# Altium PCB copper_suicide.PcbDoc (part 4 of 6)
Units mm, origin at the board's own origin, x right, y up, seen from the top; angles counter-clockwise.
Board outline 200 x 200 mm, 10 copper layers (Top Layer, Signal Layer 1, Signal Layer 2, Signal Layer 3, Signal Layer 4, Signal Layer 5, Signal Layer 6, Signal Layer 7, Signal Layer 8, Bottom Layer), stack 1.555 mm thick; 36 components, 3934 nets, 1640 pads, 0 vias.
Unrouted connection lines stored in the file: 671.
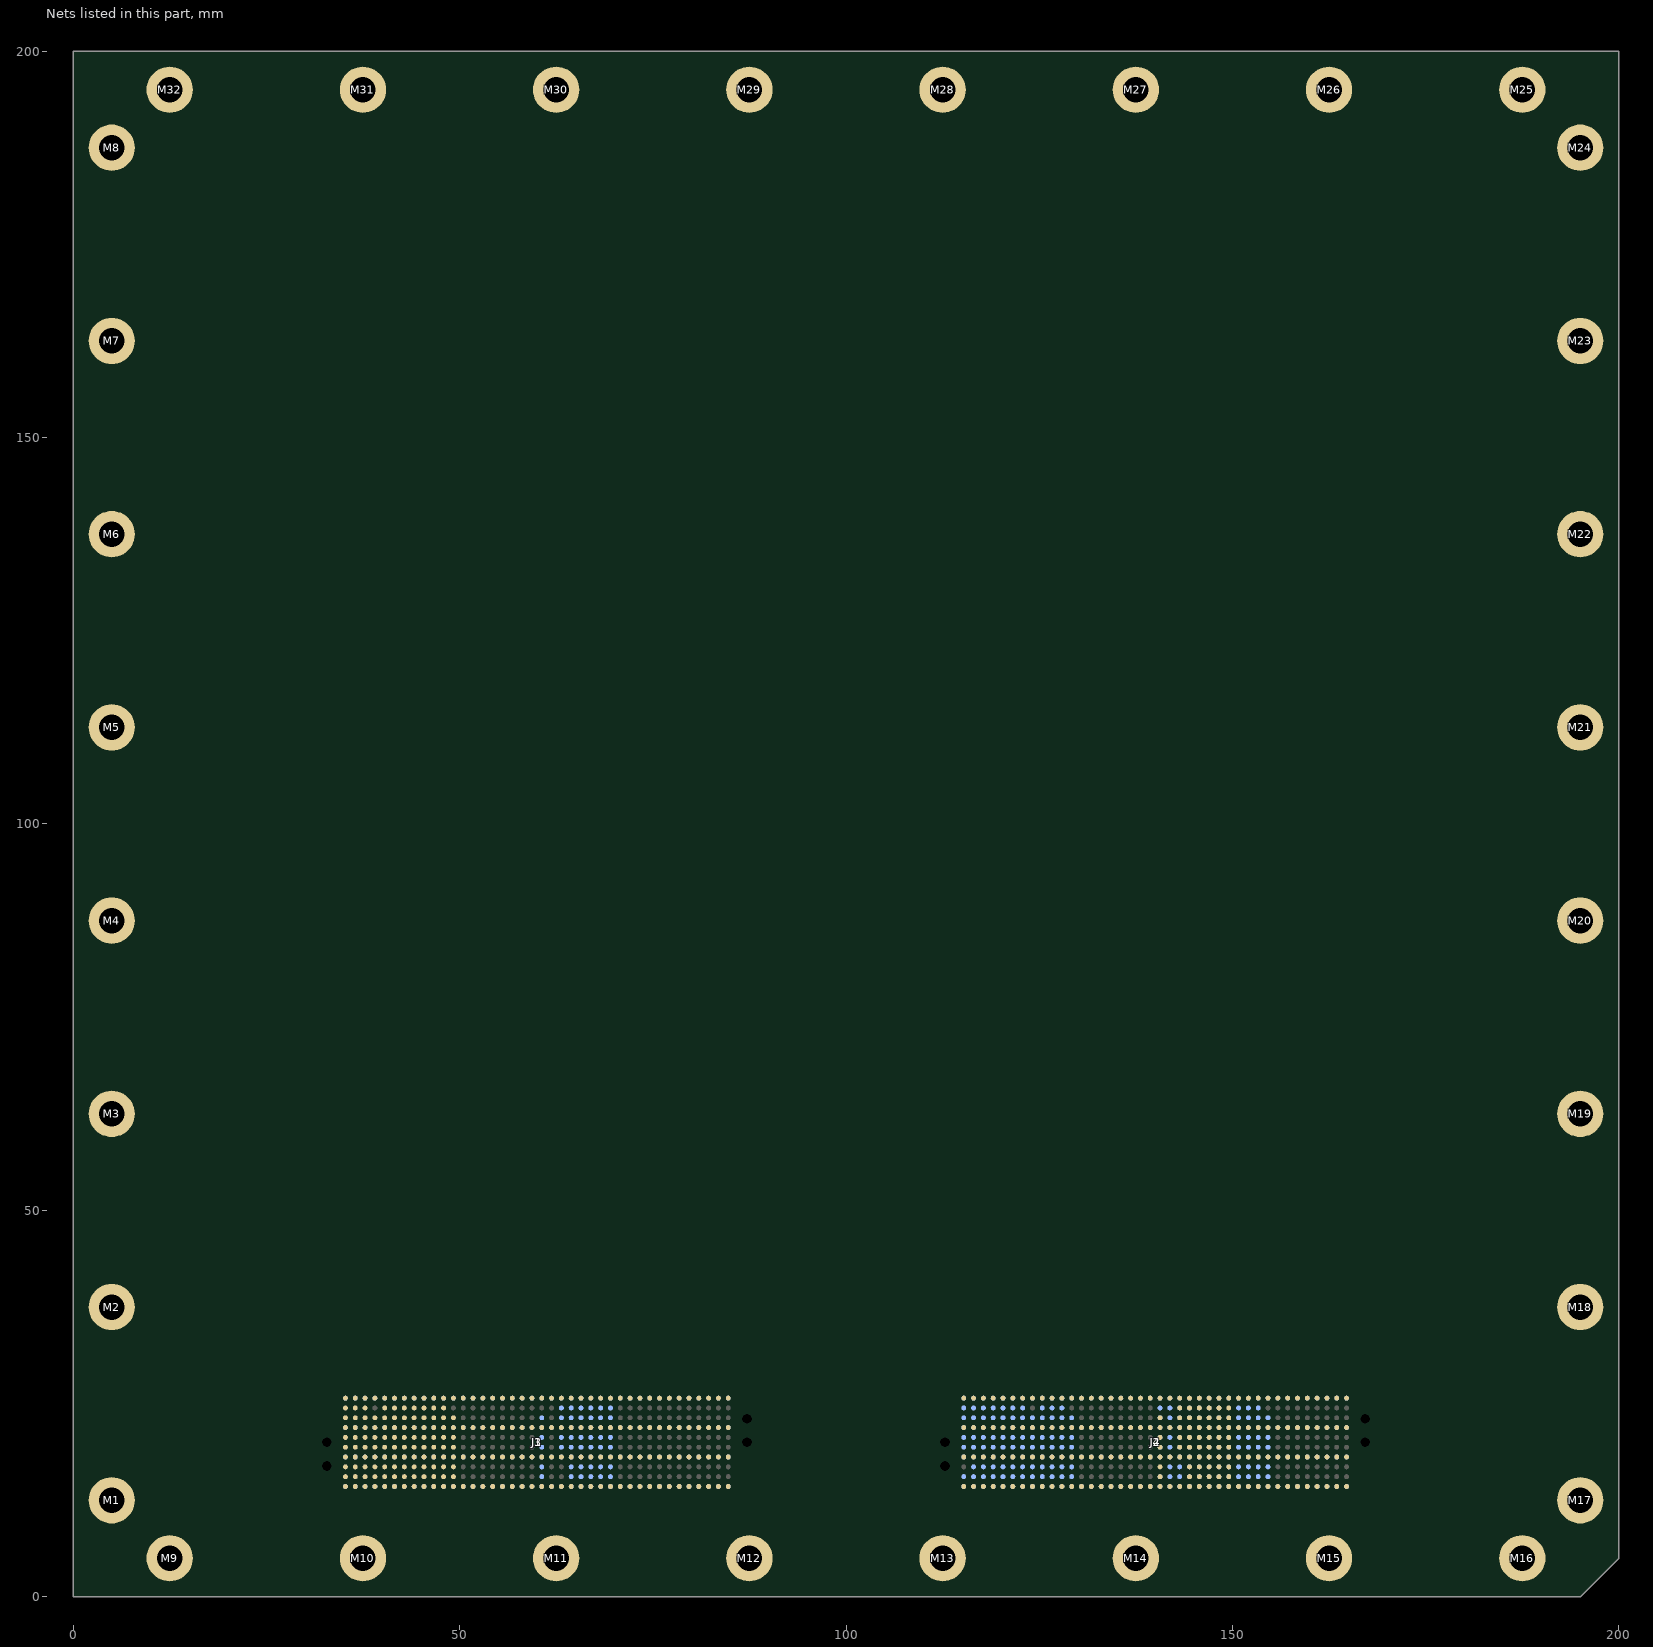
[diagram p4: the nets of this part, all layers, seen from the top]

## Footprints (in the part's own frame and the unit in brackets; to place one, negate y for a bottom-side part, rotate by r counter-clockwise, add the part's x,y. Pads: shape width x height; smd on the part's side, far side on the other; paste and mask are expansions set on the pad)
MOUNTM3 [mm] "M3 Standard Fit Hole"
  round 6 hole 3.3 paste+0: 1(0,0)
SEAF-40-06.5-S-10-2-A-K-TR [mil] "Terminal Array Assembly, Surface Mount, 0.050\" Pitch, 400 Pins"
  round 25 smd paste+5 mask+2: 1(975,-225) 2(975,-175) 3(975,-125) 4(975,-75) 5(975,-25) 6(975,25) 7(975,75) 8(975,125) 9(975,175) 10(975,225) 11(925,-225) 12(925,-175) 13(925,-125) 14(925,-75) 15(925,-25) 16(925,25) 17(925,75) 18(925,125) 19(925,175) 20(925,225) 21(875,-225) 22(875,-175) 23(875,-125) 24(875,-75) 25(875,-25) 26(875,25) 27(875,75) 28(875,125) 29(875,175) 30(875,225) 31(825,-225) 32(825,-175) 33(825,-125) 34(825,-75) 35(825,-25) 36(825,25) 37(825,75) 38(825,125) 39(825,175) 40(825,225) 41(775,-225) 42(775,-175) 43(775,-125) 44(775,-75) 45(775,-25) 46(775,25) 47(775,75) 48(775,125) 49(775,175) 50(775,225) 51(725,-225) 52(725,-175) 53(725,-125) 54(725,-75) 55(725,-25) 56(725,25) 57(725,75) 58(725,125) 59(725,175) 60(725,225) 61(675,-225) 62(675,-175) 63(675,-125) 64(675,-75) 65(675,-25) 66(675,25) 67(675,75) 68(675,125) 69(675,175) 70(675,225) 71(625,-225) 72(625,-175) 73(625,-125) 74(625,-75) 75(625,-25) 76(625,25) 77(625,75) 78(625,125) 79(625,175) 80(625,225) 81(575,-225) 82(575,-175) 83(575,-125) 84(575,-75) 85(575,-25) 86(575,25) 87(575,75) 88(575,125) 89(575,175) 90(575,225) 91(525,-225) 92(525,-175) 93(525,-125) 94(525,-75) 95(525,-25) 96(525,25) 97(525,75) 98(525,125) 99(525,175) 100(525,225) 101(475,-225) 102(475,-175) 103(475,-125) 104(475,-75) 105(475,-25) 106(475,25) 107(475,75) 108(475,125) 109(475,175) 110(475,225) 111(425,-225) 112(425,-175) 113(425,-125) 114(425,-75) 115(425,-25) 116(425,25) 117(425,75) 118(425,125) 119(425,175) 120(425,225) 121(375,-225) 122(375,-175) 123(375,-125) 124(375,-75) 125(375,-25) 126(375,25) 127(375,75) 128(375,125) 129(375,175) 130(375,225) 131(325,-225) 132(325,-175) 133(325,-125) 134(325,-75) 135(325,-25) 136(325,25) 137(325,75) 138(325,125) 139(325,175) 140(325,225) 141(275,-225) 142(275,-175) 143(275,-125) 144(275,-75) 145(275,-25) 146(275,25) 147(275,75) 148(275,125) 149(275,175) 150(275,225) 151(225,-225) 152(225,-175) 153(225,-125) 154(225,-75) 155(225,-25) 156(225,25) 157(225,75) 158(225,125) 159(225,175) 160(225,225) 161(175,-225) 162(175,-175) 163(175,-125) 164(175,-75) 165(175,-25) 166(175,25) 167(175,75) 168(175,125) 169(175,175) 170(175,225) 171(125,-225) 172(125,-175) 173(125,-125) 174(125,-75) 175(125,-25) 176(125,25) 177(125,75) 178(125,125) 179(125,175) 180(125,225) 181(75,-225) 182(75,-175) 183(75,-125) 184(75,-75) 185(75,-25) 186(75,25) 187(75,75) 188(75,125) 189(75,175) 190(75,225) 191(25,-225) 192(25,-175) 193(25,-125) 194(25,-75) 195(25,-25) 196(25,25) 197(25,75) 198(25,125) 199(25,175) 200(25,225) 201(-25,-225) 202(-25,-175) 203(-25,-125) 204(-25,-75) 205(-25,-25) 206(-25,25) 207(-25,75) 208(-25,125) 209(-25,175) 210(-25,225) 211(-75,-225) 212(-75,-175) 213(-75,-125) 214(-75,-75) 215(-75,-25) 216(-75,25) 217(-75,75) 218(-75,125) 219(-75,175) 220(-75,225) 221(-125,-225) 222(-125,-175) 223(-125,-125) 224(-125,-75) 225(-125,-25) 226(-125,25) 227(-125,75) 228(-125,125) 229(-125,175) 230(-125,225) 231(-175,-225) 232(-175,-175) 233(-175,-125) 234(-175,-75) 235(-175,-25) 236(-175,25) 237(-175,75) 238(-175,125) 239(-175,175) 240(-175,225) 241(-225,-225) 242(-225,-175) 243(-225,-125) 244(-225,-75) 245(-225,-25) 246(-225,25) 247(-225,75) 248(-225,125) 249(-225,175) 250(-225,225) 251(-275,-225) 252(-275,-175) 253(-275,-125) 254(-275,-75) 255(-275,-25) 256(-275,25) 257(-275,75) 258(-275,125) 259(-275,175) 260(-275,225) 261(-325,-225) 262(-325,-175) 263(-325,-125) 264(-325,-75) 265(-325,-25) 266(-325,25) 267(-325,75) 268(-325,125) 269(-325,175) 270(-325,225) 271(-375,-225) 272(-375,-175) 273(-375,-125) 274(-375,-75) 275(-375,-25) 276(-375,25) 277(-375,75) 278(-375,125) 279(-375,175) 280(-375,225) 281(-425,-225) 282(-425,-175) 283(-425,-125) 284(-425,-75) 285(-425,-25) 286(-425,25) 287(-425,75) 288(-425,125) 289(-425,175) 290(-425,225) 291(-475,-225) 292(-475,-175) 293(-475,-125) 294(-475,-75) 295(-475,-25) 296(-475,25) 297(-475,75) 298(-475,125) 299(-475,175) 300(-475,225) 301(-525,-225) 302(-525,-175) 303(-525,-125) 304(-525,-75) 305(-525,-25) 306(-525,25) 307(-525,75) 308(-525,125) 309(-525,175) 310(-525,225) 311(-575,-225) 312(-575,-175) 313(-575,-125) 314(-575,-75) 315(-575,-25) 316(-575,25) 317(-575,75) 318(-575,125) 319(-575,175) 320(-575,225) 321(-625,-225) 322(-625,-175) 323(-625,-125) 324(-625,-75) 325(-625,-25) 326(-625,25) 327(-625,75) 328(-625,125) 329(-625,175) 330(-625,225) 331(-675,-225) 332(-675,-175) 333(-675,-125) 334(-675,-75) 335(-675,-25) 336(-675,25) 337(-675,75) 338(-675,125) 339(-675,175) 340(-675,225) 341(-725,-225) 342(-725,-175) 343(-725,-125) 344(-725,-75) 345(-725,-25) 346(-725,25) 347(-725,75) 348(-725,125) 349(-725,175) 350(-725,225) 351(-775,-225) 352(-775,-175) 353(-775,-125) 354(-775,-75) 355(-775,-25) 356(-775,25) 357(-775,75) 358(-775,125) 359(-775,175) 360(-775,225) 361(-825,-225) 362(-825,-175) 363(-825,-125) 364(-825,-75) 365(-825,-25) 366(-825,25) 367(-825,75) 368(-825,125) 369(-825,175) 370(-825,225) 371(-875,-225) 372(-875,-175) 373(-875,-125) 374(-875,-75) 375(-875,-25) 376(-875,25) 377(-875,75) 378(-875,125) 379(-875,175) 380(-875,225) 381(-925,-225) 382(-925,-175) 383(-925,-125) 384(-925,-75) 385(-925,-25) 386(-925,25) 387(-925,75) 388(-925,125) 389(-925,175) 390(-925,225) 391(-975,-225) 392(-975,-175) 393(-975,-125) 394(-975,-75) 395(-975,-25) 396(-975,25) 397(-975,75) 398(-975,125) 399(-975,175) 400(-975,225)
  round 25 hole 50 unplated mask+22.5: 401(1070.5,-120) 402(-1070.5,0)
  silkscreen extent -1151,-281 1151,281
SEAM-40-11.0-S-10-2-A-K-TR [mil] "Terminal Array Assembly, Surface Mount, 0.050\" Pitch, 400 Pins"
  round 25 smd paste+5 mask+2: 1(975,225) 2(975,175) 3(975,125) 4(975,75) 5(975,25) 6(975,-25) 7(975,-75) 8(975,-125) 9(975,-175) 10(975,-225) 11(925,225) 12(925,175) 13(925,125) 14(925,75) 15(925,25) 16(925,-25) 17(925,-75) 18(925,-125) 19(925,-175) 20(925,-225) 21(875,225) 22(875,175) 23(875,125) 24(875,75) 25(875,25) 26(875,-25) 27(875,-75) 28(875,-125) 29(875,-175) 30(875,-225) 31(825,225) 32(825,175) 33(825,125) 34(825,75) 35(825,25) 36(825,-25) 37(825,-75) 38(825,-125) 39(825,-175) 40(825,-225) 41(775,225) 42(775,175) 43(775,125) 44(775,75) 45(775,25) 46(775,-25) 47(775,-75) 48(775,-125) 49(775,-175) 50(775,-225) 51(725,225) 52(725,175) 53(725,125) 54(725,75) 55(725,25) 56(725,-25) 57(725,-75) 58(725,-125) 59(725,-175) 60(725,-225) 61(675,225) 62(675,175) 63(675,125) 64(675,75) 65(675,25) 66(675,-25) 67(675,-75) 68(675,-125) 69(675,-175) 70(675,-225) 71(625,225) 72(625,175) 73(625,125) 74(625,75) 75(625,25) 76(625,-25) 77(625,-75) 78(625,-125) 79(625,-175) 80(625,-225) 81(575,225) 82(575,175) 83(575,125) 84(575,75) 85(575,25) 86(575,-25) 87(575,-75) 88(575,-125) 89(575,-175) 90(575,-225) 91(525,225) 92(525,175) 93(525,125) 94(525,75) 95(525,25) 96(525,-25) 97(525,-75) 98(525,-125) 99(525,-175) 100(525,-225) 101(475,225) 102(475,175) 103(475,125) 104(475,75) 105(475,25) 106(475,-25) 107(475,-75) 108(475,-125) 109(475,-175) 110(475,-225) 111(425,225) 112(425,175) 113(425,125) 114(425,75) 115(425,25) 116(425,-25) 117(425,-75) 118(425,-125) 119(425,-175) 120(425,-225) 121(375,225) 122(375,175) 123(375,125) 124(375,75) 125(375,25) 126(375,-25) 127(375,-75) 128(375,-125) 129(375,-175) 130(375,-225) 131(325,225) 132(325,175) 133(325,125) 134(325,75) 135(325,25) 136(325,-25) 137(325,-75) 138(325,-125) 139(325,-175) 140(325,-225) 141(275,225) 142(275,175) 143(275,125) 144(275,75) 145(275,25) 146(275,-25) 147(275,-75) 148(275,-125) 149(275,-175) 150(275,-225) 151(225,225) 152(225,175) 153(225,125) 154(225,75) 155(225,25) 156(225,-25) 157(225,-75) 158(225,-125) 159(225,-175) 160(225,-225) 161(175,225) 162(175,175) 163(175,125) 164(175,75) 165(175,25) 166(175,-25) 167(175,-75) 168(175,-125) 169(175,-175) 170(175,-225) 171(125,225) 172(125,175) 173(125,125) 174(125,75) 175(125,25) 176(125,-25) 177(125,-75) 178(125,-125) 179(125,-175) 180(125,-225) 181(75,225) 182(75,175) 183(75,125) 184(75,75) 185(75,25) 186(75,-25) 187(75,-75) 188(75,-125) 189(75,-175) 190(75,-225) 191(25,225) 192(25,175) 193(25,125) 194(25,75) 195(25,25) 196(25,-25) 197(25,-75) 198(25,-125) 199(25,-175) 200(25,-225) 201(-25,225) 202(-25,175) 203(-25,125) 204(-25,75) 205(-25,25) 206(-25,-25) 207(-25,-75) 208(-25,-125) 209(-25,-175) 210(-25,-225) 211(-75,225) 212(-75,175) 213(-75,125) 214(-75,75) 215(-75,25) 216(-75,-25) 217(-75,-75) 218(-75,-125) 219(-75,-175) 220(-75,-225) 221(-125,225) 222(-125,175) 223(-125,125) 224(-125,75) 225(-125,25) 226(-125,-25) 227(-125,-75) 228(-125,-125) 229(-125,-175) 230(-125,-225) 231(-175,225) 232(-175,175) 233(-175,125) 234(-175,75) 235(-175,25) 236(-175,-25) 237(-175,-75) 238(-175,-125) 239(-175,-175) 240(-175,-225) 241(-225,225) 242(-225,175) 243(-225,125) 244(-225,75) 245(-225,25) 246(-225,-25) 247(-225,-75) 248(-225,-125) 249(-225,-175) 250(-225,-225) 251(-275,225) 252(-275,175) 253(-275,125) 254(-275,75) 255(-275,25) 256(-275,-25) 257(-275,-75) 258(-275,-125) 259(-275,-175) 260(-275,-225) 261(-325,225) 262(-325,175) 263(-325,125) 264(-325,75) 265(-325,25) 266(-325,-25) 267(-325,-75) 268(-325,-125) 269(-325,-175) 270(-325,-225) 271(-375,225) 272(-375,175) 273(-375,125) 274(-375,75) 275(-375,25) 276(-375,-25) 277(-375,-75) 278(-375,-125) 279(-375,-175) 280(-375,-225) 281(-425,225) 282(-425,175) 283(-425,125) 284(-425,75) 285(-425,25) 286(-425,-25) 287(-425,-75) 288(-425,-125) 289(-425,-175) 290(-425,-225) 291(-475,225) 292(-475,175) 293(-475,125) 294(-475,75) 295(-475,25) 296(-475,-25) 297(-475,-75) 298(-475,-125) 299(-475,-175) 300(-475,-225) 301(-525,225) 302(-525,175) 303(-525,125) 304(-525,75) 305(-525,25) 306(-525,-25) 307(-525,-75) 308(-525,-125) 309(-525,-175) 310(-525,-225) 311(-575,225) 312(-575,175) 313(-575,125) 314(-575,75) 315(-575,25) 316(-575,-25) 317(-575,-75) 318(-575,-125) 319(-575,-175) 320(-575,-225) 321(-625,225) 322(-625,175) 323(-625,125) 324(-625,75) 325(-625,25) 326(-625,-25) 327(-625,-75) 328(-625,-125) 329(-625,-175) 330(-625,-225) 331(-675,225) 332(-675,175) 333(-675,125) 334(-675,75) 335(-675,25) 336(-675,-25) 337(-675,-75) 338(-675,-125) 339(-675,-175) 340(-675,-225) 341(-725,225) 342(-725,175) 343(-725,125) 344(-725,75) 345(-725,25) 346(-725,-25) 347(-725,-75) 348(-725,-125) 349(-725,-175) 350(-725,-225) 351(-775,225) 352(-775,175) 353(-775,125) 354(-775,75) 355(-775,25) 356(-775,-25) 357(-775,-75) 358(-775,-125) 359(-775,-175) 360(-775,-225) 361(-825,225) 362(-825,175) 363(-825,125) 364(-825,75) 365(-825,25) 366(-825,-25) 367(-825,-75) 368(-825,-125) 369(-825,-175) 370(-825,-225) 371(-875,225) 372(-875,175) 373(-875,125) 374(-875,75) 375(-875,25) 376(-875,-25) 377(-875,-75) 378(-875,-125) 379(-875,-175) 380(-875,-225) 381(-925,225) 382(-925,175) 383(-925,125) 384(-925,75) 385(-925,25) 386(-925,-25) 387(-925,-75) 388(-925,-125) 389(-925,-175) 390(-925,-225) 391(-975,225) 392(-975,175) 393(-975,125) 394(-975,75) 395(-975,25) 396(-975,-25) 397(-975,-75) 398(-975,-125) 399(-975,-175) 400(-975,-225)
  round 0 hole 50 unplated: 401(1070.5,0) 402(-1070.5,-120)
  silkscreen extent -1118,-334 1153,334

## Part data
J1 J2 J3 J4: "Terminal Array Assembly, Surface Mount, 0.050\" Pitch, 400 Pins"
M1 M2 M3 M4 M5 M6 M7 M8 M9 M10 M11 M12 M13 M14 M15 M16 M17 M18 M19 M20 M21 M22 M23 M24 M25 M26 M27 M28 M29 M30 M31 M32: "M3 Standard Fit Hole"

## Nets (pads, with @x,y where several pads share a name; then routed paths per layer and width w, separated by ;. In a path a pad name is that pad's centre, name@x,y a point inside that pad or via, vN(x,y) a via of type N, cw(c..) or ccw(c..) an arc to the next point about the centre after c; other vN are vias at no path point)
A00.CTRL.CASN_5: 
A00.CTRL.CKE_5: 
A00.CTRL.CLK_5_N: 
A00.CTRL.CLK_5_P: 
A00.CTRL.CSN_5: 
A00.CTRL.ODT_5: 
A00.CTRL.RASN_5: 
A00.CTRL.RSTN_5: 
A00.CTRL.WEN_5: 
A00.DA/B.A0_5: 
A00.DA/B.A1_5: 
A00.DA/B.A2_5: 
A00.DA/B.A3_5: 
A00.DA/B.A4_5: 
A00.DA/B.A5_5: 
A00.DA/B.A6_5: 
A00.DA/B.A7_5: 
A00.DA/B.A8_5: 
A00.DA/B.A9_5: 
A00.DA/B.A10_5: 
A00.DA/B.A11_5: 
A00.DA/B.A12_5: 
A00.DA/B.A13_5: 
A00.DA/B.A14_5: 
A00.DA/B.A15_5: 
A00.DA/B.B0_5: 
A00.DA/B.B1_5: 
A00.DA/B.B2_5: 
A01.CTRL.CASN_5: 
A01.CTRL.CKE_5: 
A01.CTRL.CLK_5_N: 
A01.CTRL.CLK_5_P: 
A01.CTRL.CSN_5: 
A01.CTRL.ODT_5: 
A01.CTRL.RASN_5: 
A01.CTRL.RSTN_5: 
A01.CTRL.WEN_5: 
A01.DA/B.A0_5: 
A01.DA/B.A1_5: 
A01.DA/B.A2_5: 
A01.DA/B.A3_5: 
A01.DA/B.A4_5: 
A01.DA/B.A5_5: 
A01.DA/B.A6_5: 
A01.DA/B.A7_5: 
A01.DA/B.A8_5: 
A01.DA/B.A9_5: 
A01.DA/B.A10_5: 
A01.DA/B.A11_5: 
A01.DA/B.A12_5: 
A01.DA/B.A13_5: 
A01.DA/B.A14_5: 
A01.DA/B.A15_5: 
A01.DA/B.B0_5: 
A01.DA/B.B1_5: 
A01.DA/B.B2_5: 
A02.CTRL.CASN_5: 
A02.CTRL.CKE_5: 
A02.CTRL.CLK_5_N: 
A02.CTRL.CLK_5_P: 
A02.CTRL.CSN_5: 
A02.CTRL.ODT_5: 
A02.CTRL.RASN_5: 
A02.CTRL.RSTN_5: 
A02.CTRL.WEN_5: 
A02.DA/B.A0_5: 
A02.DA/B.A1_5: 
A02.DA/B.A2_5: 
A02.DA/B.A3_5: 
A02.DA/B.A4_5: 
A02.DA/B.A5_5: 
A02.DA/B.A6_5: 
A02.DA/B.A7_5: 
A02.DA/B.A8_5: 
A02.DA/B.A9_5: 
A02.DA/B.A10_5: 
A02.DA/B.A11_5: 
A02.DA/B.A12_5: 
A02.DA/B.A13_5: 
A02.DA/B.A14_5: 
A02.DA/B.A15_5: 
A02.DA/B.B0_5: 
A02.DA/B.B1_5: 
A02.DA/B.B2_5: 
A03.CTRL.CASN_5: 
A03.CTRL.CKE_5: 
A03.CTRL.CLK_5_N: 
A03.CTRL.CLK_5_P: 
A03.CTRL.CSN_5: 
A03.CTRL.ODT_5: 
A03.CTRL.RASN_5: 
A03.CTRL.RSTN_5: 
A03.CTRL.WEN_5: 
A03.DA/B.A0_5: 
A03.DA/B.A1_5: 
A03.DA/B.A2_5: 
A03.DA/B.A3_5: 
A03.DA/B.A4_5: 
A03.DA/B.A5_5: 
A03.DA/B.A6_5: 
A03.DA/B.A7_5: 
A03.DA/B.A8_5: 
A03.DA/B.A9_5: 
A03.DA/B.A10_5: 
A03.DA/B.A11_5: 
A03.DA/B.A12_5: 
A03.DA/B.A13_5: 
A03.DA/B.A14_5: 
A03.DA/B.A15_5: 
A03.DA/B.B0_5: 
A03.DA/B.B1_5: 
A03.DA/B.B2_5: 
A30.CTRL.CASN_5: 
A30.CTRL.CKE_5: 
A30.CTRL.CLK_5_N: 
A30.CTRL.CLK_5_P: 
A30.CTRL.CSN_5: 
A30.CTRL.ODT_5: 
A30.CTRL.RASN_5: 
A30.CTRL.RSTN_5: 
A30.CTRL.WEN_5: 
A30.DA/B.A0_5: 
A30.DA/B.A1_5: 
A30.DA/B.A2_5: 
A30.DA/B.A3_5: 
A30.DA/B.A4_5: 
A30.DA/B.A5_5: 
A30.DA/B.A6_5: 
A30.DA/B.A7_5: 
A30.DA/B.A8_5: 
A30.DA/B.A9_5: 
A30.DA/B.A10_5: 
A30.DA/B.A11_5: 
A30.DA/B.A12_5: 
A30.DA/B.A13_5: 
A30.DA/B.A14_5: 
A30.DA/B.A15_5: 
A30.DA/B.B0_5: 
A30.DA/B.B1_5: 
A30.DA/B.B2_5: 
A31.CTRL.CASN_5: 
A31.CTRL.CKE_5: 
A31.CTRL.CLK_5_N: 
A31.CTRL.CLK_5_P: 
A31.CTRL.CSN_5: 
A31.CTRL.ODT_5: 
A31.CTRL.RASN_5: 
A31.CTRL.RSTN_5: 
A31.CTRL.WEN_5: 
A31.DA/B.A0_5: 
A31.DA/B.A1_5: 
A31.DA/B.A2_5: 
A31.DA/B.A3_5: 
A31.DA/B.A4_5: 
A31.DA/B.A5_5: 
A31.DA/B.A6_5: 
A31.DA/B.A7_5: 
A31.DA/B.A8_5: 
A31.DA/B.A9_5: 
A31.DA/B.A10_5: 
A31.DA/B.A11_5: 
A31.DA/B.A12_5: 
A31.DA/B.A13_5: 
A31.DA/B.A14_5: 
A31.DA/B.A15_5: 
A31.DA/B.B0_5: 
A31.DA/B.B1_5: 
A31.DA/B.B2_5: 
A32.CTRL.CASN_5: 
A32.CTRL.CKE_5: 
A32.CTRL.CLK_5_N: 
A32.CTRL.CLK_5_P: 
A32.CTRL.CSN_5: 
A32.CTRL.ODT_5: 
A32.CTRL.RASN_5: 
A32.CTRL.RSTN_5: 
A32.CTRL.WEN_5: 
A32.DA/B.A0_5: 
A32.DA/B.A1_5: 
A32.DA/B.A2_5: 
A32.DA/B.A3_5: 
A32.DA/B.A4_5: 
A32.DA/B.A5_5: 
A32.DA/B.A6_5: 
A32.DA/B.A7_5: 
A32.DA/B.A8_5: 
A32.DA/B.A9_5: 
A32.DA/B.A10_5: 
A32.DA/B.A11_5: 
A32.DA/B.A12_5: 
A32.DA/B.A13_5: 
A32.DA/B.A14_5: 
A32.DA/B.A15_5: 
A32.DA/B.B0_5: 
A32.DA/B.B1_5: 
A32.DA/B.B2_5: 
A33.CTRL.CASN_5: 
A33.CTRL.CKE_5: 
A33.CTRL.CLK_5_N: 
A33.CTRL.CLK_5_P: 
A33.CTRL.CSN_5: 
A33.CTRL.ODT_5: 
A33.CTRL.RASN_5: 
A33.CTRL.RSTN_5: 
A33.CTRL.WEN_5: 
A33.DA/B.A0_5: 
A33.DA/B.A1_5: 
A33.DA/B.A2_5: 
A33.DA/B.A3_5: 
A33.DA/B.A4_5: 
A33.DA/B.A5_5: 
A33.DA/B.A6_5: 
A33.DA/B.A7_5: 
A33.DA/B.A8_5: 
A33.DA/B.A9_5: 
A33.DA/B.A10_5: 
A33.DA/B.A11_5: 
A33.DA/B.A12_5: 
A33.DA/B.A13_5: 
A33.DA/B.A14_5: 
A33.DA/B.A15_5: 
A33.DA/B.B0_5: 
A33.DA/B.B1_5: 
A33.DA/B.B2_5: 
B2B_48V: J1.225 J1.226 J1.228 J1.229 J1.232 J1.233 J1.235 J1.236 J1.238 J1.239 J1.242 J1.243 J1.245 J1.246 J1.248 J1.249 J4.225 J4.226 J4.228 J4.229 J4.232 J4.233 J4.235 J4.236 J4.238 J4.239 J4.242 J4.243 J4.245 J4.246 J4.248 J4.249
BD_JTAGO_VREF_42: 
CB.MCLK.C_17_N: 
CB.MCLK.C_17_P: 
CB.OBCLK_17_N: 
CB.OBCLK_17_P: 
CFG00.CCLK_5: 
CFG00.DIN_5: 
CFG00.DONE_5: 
CFG00.DOUT_5: 
CFG00.INITN_5: 
CFG00.PROGN_5: 
CFG01.CCLK_5: 
CFG01.DIN_5: 
CFG01.DONE_5: 
CFG01.DOUT_5: 
CFG01.INITN_5: 
CFG01.PROGN_5: 
CFG02.CCLK_5: 
CFG02.DIN_5: 
CFG02.DONE_5: 
CFG02.DOUT_5: 
CFG02.INITN_5: 
CFG02.PROGN_5: 
CFG03.CCLK_5: 
CFG03.DIN_5: 
CFG03.DONE_5: 
CFG03.DOUT_5: 
CFG03.INITN_5: 
CFG03.PROGN_5: 
CFG10.CCLK_5: 
CFG10.DIN_5: 
CFG10.DONE_5: 
CFG10.DOUT_5: 
CFG10.INITN_5: 
CFG10.PROGN_5: 
CFG11.CCLK_5: 
CFG11.DIN_5: 
CFG11.DONE_5: 
CFG11.DOUT_5: 
CFG11.INITN_5: 
CFG11.PROGN_5: 
CFG12.CCLK_5: 
CFG12.DIN_5: 
CFG12.DONE_5: 
CFG12.DOUT_5: 
CFG12.INITN_5: 
CFG12.PROGN_5: 
CFG13.CCLK_5: 
CFG13.DIN_5: 
CFG13.DONE_5: 
CFG13.DOUT_5: 
CFG13.INITN_5: 
CFG13.PROGN_5: 
CFG20.CCLK_5: 
CFG20.DIN_5: 
CFG20.DONE_5: 
CFG20.DOUT_5: 
CFG20.INITN_5: 
CFG20.PROGN_5: 
CFG21.CCLK_5: 
CFG21.DIN_5: 
CFG21.DONE_5: 
CFG21.DOUT_5: 
CFG21.INITN_5: 
CFG21.PROGN_5: 
CFG22.CCLK_5: 
CFG22.DIN_5: 
CFG22.DONE_5: 
CFG22.DOUT_5: 
CFG22.INITN_5: 
CFG22.PROGN_5: 
CFG23.CCLK_5: 
CFG23.DIN_5: 
CFG23.DONE_5: 
CFG23.DOUT_5: 
CFG23.INITN_5: 
CFG23.PROGN_5: 
CFG30.CCLK_5: 
CFG30.DIN_5: 
CFG30.DONE_5: 
CFG30.DOUT_5: 
CFG30.INITN_5: 
CFG30.PROGN_5: 
CFG31.CCLK_5: 
CFG31.DIN_5: 
CFG31.DONE_5: 
CFG31.DOUT_5: 
CFG31.INITN_5: 
CFG31.PROGN_5: 
CFG32.CCLK_5: 
CFG32.DIN_5: 
CFG32.DONE_5: 
CFG32.DOUT_5: 
CFG32.INITN_5: 
CFG32.PROGN_5: 
CFG33.CCLK_5: 
CFG33.DIN_5: 
CFG33.DONE_5: 
CFG33.DOUT_5: 
CFG33.INITN_5: 
CFG33.PROGN_5: 
CFG_CS1N_25: 
CFG_CSN_25: 
CFG_SPI_DQ0_25: 
CFG_SPI_DQ1_25: 
CFG_SPI_DQ2_25: 
CFG_SPI_DQ3_25: 
CFG_SPI_SN_25: 
CFG_WRITEN_25: 
CFGLOCALCLK_18: 
CLK00.C_5_N: 
CLK00.C_5_P: 
CLK01.C_5_N: 
CLK01.C_5_P: 
CLK02.C_5_N: 
CLK02.C_5_P: 
CLK03.C_5_N: 
CLK03.C_5_P: 
CLK10.C_5_N: 
CLK10.C_5_P: 
CLK11.C_5_N: 
CLK11.C_5_P: 
CLK12.C_5_N: 
CLK12.C_5_P: 
CLK13.C_5_N: 
CLK13.C_5_P: 
CLK20.C_5_N: 
CLK20.C_5_P: 
CLK21.C_5_N: 
CLK21.C_5_P: 
CLK22.C_5_N: 
CLK22.C_5_P: 
CLK23.C_5_N: 
CLK23.C_5_P: 
CLK30.C_5_N: 
CLK30.C_5_P: 
CLK31.C_5_N: 
CLK31.C_5_P: 
CLK32.C_5_N: 
CLK32.C_5_P: 
CLK33.C_5_N: 
CLK33.C_5_P: 
CLK_UNUSED_1_17_N: 
CLK_UNUSED_1_17_P: 
CLK_UNUSED_2_17_N: 
CLK_UNUSED_2_17_P: 
CLKCFG.C_5_N: 
CLKCFG.C_5_P: 
DDR3_VREF: 
DDR3_VTT: 
F.CLK.C_35_N: 
F.CLK.C_35_P: 
F.CLK.C_37_N: 
F.CLK.C_37_P: 
F.CLK.C_56_N: 
F.CLK.C_56_P: 
F.CLK.C_57_N: 
F.CLK.C_57_P: 
F.CLK.C_58_N: 
F.CLK.C_58_P: 
F.CLK.C_59_N: 
F.CLK.C_59_P: 
F.CLK.C_60_N: 
F.CLK.C_60_P: 
F.CLK.C_61_N: 
F.CLK.C_61_P: 
F.CLK.C_62_N: 
F.CLK.C_62_P: 
F.CLK.C_63_N: 
F.CLK.C_63_P: 
F.CLK.C_64_N: 
F.CLK.C_64_P: 
F.CLK.C_65_N: 
F.CLK.C_65_P: 
F.CLK.C_66_N: 
F.CLK.C_66_P: 
F.CLK.C_67_N: 
F.CLK.C_67_P: 
F.CLK.C_68_N: 
F.CLK.C_68_P: 
F.CLK.C_69_N: 
F.CLK.C_69_P: 
F.CLKCFG.C_21_N: 
F.CLKCFG.C_21_P: 
FPGA_DONE_25: 
FPGA_DONE_BUF_25: 
FPGA_INIT_25: 
FPGA_INIT_BUF_25: 
FPGA_PROG_25_N: 
FPGA_TCK_15_25: 
FPGA_TDI_15_25: 
FPGA_TDI_25: 
FPGA_TDO_15_25: 
FPGA_TDO_25: 
FPGA_TMS_15_25: 
FPGA_VCCA: 
FPGA_VCCB: 
FPGA_VCCC: 
FPGA_VCCD: 
FPGA_VCCE: 
FPGA_VCCF: 
FPGA_VCCG: 
FPGA_VCCH: 
FPGA_VCCI: 
FPGA_VCCJ: 
FPGA_VCCK: 
FPGA_VCCL: 
FPGA_VCCM: 
FPGA_VCCN: 
FPGA_VCCO: 
FPGA_VCCP: 
FPGA_VREF_25: 
FPGAO_CSN_35: 
FPGAO_CSN_37: 
FPGAO_CSN_56: 
FPGAO_CSN_57: 
FPGAO_CSN_58: 
FPGAO_CSN_59: 
FPGAO_CSN_60: 
FPGAO_CSN_61: 
FPGAO_CSN_62: 
FPGAO_CSN_63: 
FPGAO_CSN_64: 
FPGAO_CSN_65: 
FPGAO_CSN_66: 
FPGAO_CSN_67: 
FPGAO_CSN_68: 
FPGAO_CSN_69: 
FPGAO_MISO_35: 
FPGAO_MISO_37: 
FPGAO_MISO_56: 
FPGAO_MISO_57: 
FPGAO_MISO_58: 
FPGAO_MISO_59: 
FPGAO_MISO_60: 
FPGAO_MISO_61: 
FPGAO_MISO_62: 
FPGAO_MISO_63: 
FPGAO_MISO_64: 
FPGAO_MISO_65: 
FPGAO_MISO_66: 
FPGAO_MISO_67: 
FPGAO_MISO_68: 
FPGAO_MISO_69: 
FPGAO_MOSI_35: 
FPGAO_MOSI_37: 
FPGAO_MOSI_56: 
FPGAO_MOSI_57: 
FPGAO_MOSI_58: 
FPGAO_MOSI_59: 
FPGAO_MOSI_60: 
FPGAO_MOSI_61: 
FPGAO_MOSI_62: 
FPGAO_MOSI_63: 
FPGAO_MOSI_64: 
FPGAO_MOSI_65: 
FPGAO_MOSI_66: 
FPGAO_MOSI_67: 
FPGAO_MOSI_68: 
FPGAO_MOSI_69: 
FPGAO_TCK_35: 
FPGAO_TCK_37: 
FPGAO_TCK_56: 
FPGAO_TCK_57: 
FPGAO_TCK_58: 
FPGAO_TCK_59: 
FPGAO_TCK_60: 
FPGAO_TCK_61: 
FPGAO_TCK_62: 
FPGAO_TCK_63: 
FPGAO_TCK_64: 
FPGAO_TCK_65: 
FPGAO_TCK_66: 
FPGAO_TCK_67: 
FPGAO_TCK_68: 
FPGAO_TCK_69: 
FPGAO_TDI_35: 
FPGAO_TDI_37: 
FPGAO_TDI_56: 
FPGAO_TDI_57: 
FPGAO_TDI_58: 
FPGAO_TDI_59: 
FPGAO_TDI_60: 
FPGAO_TDI_61: 
FPGAO_TDI_62: 
FPGAO_TDI_63: 
FPGAO_TDI_64: 
FPGAO_TDI_65: 
FPGAO_TDI_66: 
FPGAO_TDI_67: 
FPGAO_TDI_68: 
FPGAO_TDI_69: 
FPGAO_TDO_35: 
FPGAO_TDO_37: 
FPGAO_TDO_56: 
FPGAO_TDO_57: 
FPGAO_TDO_58: 
FPGAO_TDO_59: 
FPGAO_TDO_60: 
FPGAO_TDO_61: 
FPGAO_TDO_62: 
FPGAO_TDO_63: 
FPGAO_TDO_64: 
FPGAO_TDO_65: 
FPGAO_TDO_66: 
FPGAO_TDO_67: 
FPGAO_TDO_68: 
FPGAO_TDO_69: 
FPGAO_TMS_35: 
FPGAO_TMS_37: 
FPGAO_TMS_56: 
FPGAO_TMS_57: 
FPGAO_TMS_58: 
FPGAO_TMS_59: 
FPGAO_TMS_60: 
FPGAO_TMS_61: 
FPGAO_TMS_62: 
FPGAO_TMS_63: 
FPGAO_TMS_64: 
FPGAO_TMS_65: 
FPGAO_TMS_66: 
FPGAO_TMS_67: 
FPGAO_TMS_68: 
FPGAO_TMS_69: 
FPGAO_VREF_35: 
FPGAO_VREF_37: 
FPGAO_VREF_56: 
FPGAO_VREF_57: 
FPGAO_VREF_58: 
FPGAO_VREF_59: 
FPGAO_VREF_60: 
FPGAO_VREF_61: 
FPGAO_VREF_62: 
FPGAO_VREF_63: 
FPGAO_VREF_64: 
FPGAO_VREF_65: 
FPGAO_VREF_66: 
FPGAO_VREF_67: 
FPGAO_VREF_68: 
FPGAO_VREF_69: 
GIL.GIL0_5: 
GIL.GIL1_5: 
GIL.GIL2_5: 
GIL.GIL3_5: 
GIL.GIL4_5: 
GIL.GIL5_5: 
GIL.GIL6_5: 
GIL.GIL7_5: 
GIL.GIL8_5: 
GIL.GIL9_5: 
GIL.GIL10_5: 
GIL.GIL11_5: 
GND: J1.1 J1.4 J1.7 J1.10 J1.11 J1.14 J1.17 J1.20 J1.21 J1.24 J1.27 J1.30 J1.31 J1.34 J1.37 J1.40 J1.41 J1.44 J1.47 J1.50 J1.51 J1.54 J1.57 J1.60 J1.61 J1.64 J1.67 J1.70 J1.71 J1.74 J1.77 J1.80 J1.81 J1.84 J1.87 J1.90 J1.91 J1.94 J1.97 J1.100 J1.101 J1.104 J1.107 J1.110 J1.111 J1.114 J1.117 J1.120 J1.121 J1.124 J1.127 J1.130 J1.131 J1.134 J1.137 J1.140 J1.141 J1.144 J1.147 J1.150 J1.151 J1.154 J1.157 J1.160 J1.161 J1.164 J1.167 J1.170 J1.171 J1.174 J1.177 J1.180 J1.181 J1.184 J1.187 J1.190 J1.191 J1.194 J1.197 J1.200 J1.201 J1.204 J1.207 J1.210 J1.211 J1.214 J1.217 J1.220 J1.221 J1.224 J1.227 J1.230 J1.231 J1.234 J1.237 J1.240 J1.241 J1.244 J1.247 J1.250 J1.251 J1.254 J1.257 J1.260 J1.261 J1.264 J1.267 J1.270 J1.271 J1.274 J1.277 J1.280 J1.281 J1.284 J1.287 J1.290 J1.291 J1.294 J1.297 J1.300 J1.301 J1.304 J1.307 J1.310 J1.311 J1.314 J1.317 J1.320 J1.321 J1.324 J1.327 J1.330 J1.331 J1.334 J1.337 J1.340 J1.341 J1.344 J1.347 J1.350 J1.351 J1.354 J1.357 J1.360 J1.361 J1.364 J1.367 J1.370 J1.371 J1.374 J1.377 J1.380 J1.381 J1.384 J1.387 J1.390 J1.391 J1.394 J1.397 J1.400 J2.1 J2.4 J2.7 J2.10 J2.11 J2.14 J2.17 J2.20 J2.21 J2.24 J2.27 J2.30 J2.31 J2.34 J2.37 J2.40 J2.41 J2.44 J2.47 J2.50 J2.51 J2.54 J2.57 J2.60 J2.61 J2.64 J2.67 J2.70 J2.71 J2.74 J2.77 J2.80 J2.81 J2.84 J2.87 J2.90 J2.91 J2.94 J2.97 J2.100 J2.101 J2.104 J2.107 J2.110 J2.111 J2.114 J2.117 J2.120 J2.121 J2.124 J2.127 J2.130 J2.131 J2.134 J2.137 J2.140 J2.141 J2.144 J2.147 J2.150 J2.151 J2.154 J2.157 J2.160 J2.161 J2.164 J2.167 J2.170 J2.171 J2.174 J2.177 J2.180 J2.181 J2.184 J2.187 J2.190 J2.191 J2.194 J2.197 J2.200 J2.201 J2.204 J2.207 J2.210 J2.211 J2.214 J2.217 J2.220 J2.221 J2.224 J2.227 J2.230 J2.231 J2.234 J2.237 J2.240 J2.241 J2.244 J2.247 J2.250 J2.251 J2.254 J2.257 J2.260 J2.261 J2.264 J2.267 J2.270 J2.271 J2.274 J2.277 J2.280 J2.281 J2.284 J2.287 J2.290 J2.291 J2.294 J2.297 J2.300 J2.301 J2.304 J2.307 J2.310 J2.311 J2.314 J2.317 J2.320 J2.321 J2.324 J2.327 J2.330 J2.331 J2.334 J2.337 J2.340 J2.341 J2.344 J2.347 J2.350 J2.351 J2.354 J2.357 J2.360 J2.361 J2.364 J2.367 J2.370 J2.371 J2.374 J2.377 J2.380 J2.381 J2.384 J2.387 J2.390 J2.391 J2.394 J2.397 J2.400 J3.1 J3.4 J3.7 J3.10 J3.11 J3.14 J3.17 J3.20 J3.21 J3.24 J3.27 J3.30 J3.31 J3.34 J3.37 J3.40 J3.41 J3.44 J3.47 J3.50 J3.51 J3.54 J3.57 J3.60 J3.61 J3.64 J3.67 J3.70 J3.71 J3.74 J3.77 J3.80 J3.81 J3.84 J3.87 J3.90 J3.91 J3.94 J3.97 J3.100 J3.101 J3.104 J3.107 J3.110 J3.111 J3.114 J3.117 J3.120 J3.121 J3.124 J3.127 J3.130 J3.131 J3.134 J3.137 J3.140 J3.141 J3.144 J3.147 J3.150 J3.151 J3.154 J3.157 J3.160 J3.161 J3.164 J3.167 J3.170 J3.171 J3.174 J3.177 J3.180 J3.181 J3.184 J3.187 J3.190 J3.191 J3.194 J3.197 J3.200 J3.201 J3.204 J3.207 J3.210 J3.211 J3.214 J3.217 J3.220 J3.221 J3.224 J3.227 J3.230 J3.231 J3.234 J3.237 J3.240 J3.241 J3.244 J3.247 J3.250 J3.251 J3.254 J3.257 J3.260 J3.261 J3.264 J3.267 J3.270 J3.271 J3.274 J3.277 J3.280 J3.281 J3.284 J3.287 J3.290 J3.291 J3.294 J3.297 J3.300 J3.301 J3.304 J3.307 J3.310 J3.311 J3.314 J3.317 J3.320 J3.321 J3.324 J3.327 J3.330 J3.331 J3.334 J3.337 J3.340 J3.341 J3.344 J3.347 J3.350 J3.351 J3.354 J3.357 J3.360 J3.361 J3.364 J3.367 J3.370 J3.371 J3.374 J3.377 J3.380 J3.381 J3.384 J3.387 J3.390 J3.391 J3.394 J3.397 J3.400 J4.1 J4.4 J4.7 J4.10 J4.11 J4.14 J4.17 J4.20 J4.21 J4.24 J4.27 J4.30 J4.31 J4.34 J4.37 J4.40 J4.41 J4.44 J4.47 J4.50 J4.51 J4.54 J4.57 J4.60 J4.61 J4.64 J4.67 J4.70 J4.71 J4.74 J4.77 J4.80 J4.81 J4.84 J4.87 J4.90 J4.91 J4.94 J4.97 J4.100 J4.101 J4.104 J4.107 J4.110 J4.111 J4.114 J4.117 J4.120 J4.121 J4.124 J4.127 J4.130 J4.131 J4.134 J4.137 J4.140 J4.141 J4.144 J4.147 J4.150 J4.151 J4.154 J4.157 J4.160 J4.161 J4.164 J4.167 J4.170 J4.171 J4.174 J4.177 J4.180 J4.181 J4.184 J4.187 J4.190 J4.191 J4.194 J4.197 J4.200 J4.201 J4.204 J4.207 J4.210 J4.211 J4.214 J4.217 J4.220 J4.221 J4.224 J4.227 J4.230 J4.231 J4.234 J4.237 J4.240 J4.241 J4.244 J4.247 J4.250 J4.251 J4.254 J4.257 J4.260 J4.261 J4.264 J4.267 J4.270 J4.271 J4.274 J4.277 J4.280 J4.281 J4.284 J4.287 J4.290 J4.291 J4.294 J4.297 J4.300 J4.301 J4.304 J4.307 J4.310 J4.311 J4.314 J4.317 J4.320 J4.321 J4.324 J4.327 J4.330 J4.331 J4.334 J4.337 J4.340 J4.341 J4.344 J4.347 J4.350 J4.351 J4.354 J4.357 J4.360 J4.361 J4.364 J4.367 J4.370 J4.371 J4.374 J4.377 J4.380 J4.381 J4.384 J4.387 J4.390 J4.391 J4.394 J4.397 J4.400 M1.1 M2.1 M3.1 M4.1 M5.1 M6.1 M7.1 M8.1 M9.1 M10.1 M11.1 M12.1 M13.1 M14.1 M15.1 M16.1 M17.1 M18.1 M19.1 M20.1 M21.1 M22.1 M23.1 M24.1 M25.1 M26.1 M27.1 M28.1 M29.1 M30.1 M31.1 M32.1
GPMCI.S0_5: J4.252
GPMCI.S1_5: J4.253
GPMCI.S2_5: J4.255
GPMCI.S3_5: J4.256
GPMCI.S4_5: J4.258
GPMCI.S5_5: J4.259
GPMCI.S6_5: J4.262
GPMCI.S7_5: J4.263
GPMCI.S8_5: J4.265
GPMCI.S9_5: J4.266
GPMCI.S10_5: J4.268
GPMCI.S11_5: J4.269
GPMCI.S12_5: J4.272
GPMCI.S13_5: J4.273
GPMCI.S14_5: J4.275
GPMCI.S15_5: J4.276
GPMCI.S16_5: J4.278
GPMCI.S17_5: J4.279
GPMCI.S18_5: J4.202
GPMCI.S19_5: J4.203
GPMCI.S20_5: J4.205
GPMCI.S21_5: J4.206
GPMCI.S22_5: J4.208
GPMCO.S0_5: J1.252
GPMCO.S1_5: J1.253
GPMCO.S2_5: J1.255
GPMCO.S3_5: J1.256
GPMCO.S4_5: J1.258
GPMCO.S5_5: J1.259
GPMCO.S6_5: J1.262
GPMCO.S7_5: J1.263
GPMCO.S8_5: J1.265
GPMCO.S9_5: J1.266
GPMCO.S10_5: J1.268
GPMCO.S11_5: J1.269
GPMCO.S12_5: J1.272
GPMCO.S13_5: J1.273
GPMCO.S14_5: J1.275
GPMCO.S15_5: J1.276
GPMCO.S16_5: J1.278
GPMCO.S17_5: J1.279
GPMCO.S18_5: J1.202
GPMCO.S19_5: J1.203
GPMCO.S20_5: J1.205
GPMCO.S21_5: J1.206
GPMCO.S22_5: J1.208
IL07_00-J3A.DDRCC.S01C_5_N: J3.43
IL07_00-J3A.DDRCC.S01C_5_P: J3.42
IL07_00-J3A.DDRCC.S2_5: J3.45
IL07_00-J3A.DDRCC.S3_5: J3.46
IL07_00-J3A.DDRCC.S4_5: J3.48
IL07_00-J3A.DDRCC.S5_5: J3.49
IL07_00-J3A.DDRCC.S6_5: J3.59
IL07_00-J3A.DDRCC.S7_5: J3.58
IL07_00-J3A.DDRCC.S8_5: J3.56
IL07_00-J3A.DDRCC.S9_5: J3.55
IL07_00-J3A.DDRCC.S10_5: J3.53
IL07_00-J3A.DDRCC.S11_5: J3.52
IL07_00-J3A.DDRCC.S12_5: J3.62
IL07_00-J3A.DDRCC.S13_5: J3.63
IL07_00-J3A.DDRCC.S14_5: J3.65
IL07_00-J3A.DDRCC.S15_5: J3.66
IL07_00-J3A.DDRCC.S16_5: J3.68
IL07_00-J3A.DDRCC.S17_5: J3.69
IL07_00-J3A.DDRCC.S18_5: J3.72
IL07_00-J3A.DDRCC.S19_5: J3.73
IL07_00-J3A.DDRCC.S20_5: J3.75
IL07_00-J3A.DDRCC.S21_5: J3.76
IL07_00-J3A.DDRCC.S22_5: J3.78
IL07_00-J3A.DDRCC.S23_5: J3.79
IL07_00-J3A.DDRCC.S24_5: J3.82
IL07_00-J3A.DDRCC.S25_5: J3.83
IL07_00-J3A.DDRCC.S26_5: J3.85
IL07_00-J3A.DDRCC.S27_5: J3.86
IL07_00-J3A.DDRCC.S28_5: J3.88
IL07_00-J3A.DDRCC.S29_5: J3.89
IL07_00-J3A.DDRCC.S30_5: J3.92
IL07_00-J3A.DDRCC.S31_5: J3.93
IL07_00-J3A.DDRCC.S32_5: J3.95
IL07_00-J3A.DDRCC.S33_5: J3.96
IL07_00-J3A.DDRCC.S34_5: J3.98
IL07_00-J3A.DDRCC.S35_5: J3.99
IL07_00-J3A.DDRCC.S36_5: J3.102
IL07_00-J3A.DDRCC.S37_5: J3.103
IL07_00-J3A.DDRCC.S38_5: J3.105
IL07_00-J3A.DDRCC.S39_5: J3.106
IL07_00-J3A.DDRCC.S40_5: J3.108
IL07_00-J3A.DDRCC.S41_5: J3.109
IL07_00-J3A.DDRCC.S42_5: J3.112
IL07_00-J3A.DDRCC.S43_5: J3.113
IL07_00-J3A.DDRCC.S44_5: J3.115
IL07_00-J3A.DDRCC.S45_5: J3.116
IL07_00-J3A.DDRCC.S46_5: J3.118
IL07_00-J3A.SDRCC.GPIO8.D0_5: J3.26
IL07_00-J3A.SDRCC.GPIO8.D1_5: J3.28
IL07_00-J3A.SDRCC.GPIO8.D2_5: J3.29
IL07_00-J3A.SDRCC.GPIO8.D3_5: J3.32
IL07_00-J3A.SDRCC.GPIO8.D4_5: J3.33
IL07_00-J3A.SDRCC.GPIO8.D5_5: J3.35
IL07_00-J3A.SDRCC.GPIO8.D6_5: J3.36
IL07_00-J3A.SDRCC.GPIO8.D7_5: J3.38
IL07_00-J3A.SDRCC.GPIO15.D01C_5_N: J3.3
IL07_00-J3A.SDRCC.GPIO15.D01C_5_P: J3.2
IL07_00-J3A.SDRCC.GPIO15.D2_5: J3.5
IL07_00-J3A.SDRCC.GPIO15.D3_5: J3.6
IL07_00-J3A.SDRCC.GPIO15.D4_5: J3.8
IL07_00-J3A.SDRCC.GPIO15.D5_5: J3.9
IL07_00-J3A.SDRCC.GPIO15.D6_5: J3.12
IL07_00-J3A.SDRCC.GPIO15.D7_5: J3.13
IL07_00-J3A.SDRCC.GPIO15.D8_5: J3.15
IL07_00-J3A.SDRCC.GPIO15.D9_5: J3.16
IL07_00-J3A.SDRCC.GPIO15.D10_5: J3.18
IL07_00-J3A.SDRCC.GPIO15.D11_5: J3.19
IL07_00-J3A.SDRCC.GPIO15.D12_5: J3.22
IL07_00-J3A.SDRCC.GPIO15.D13_5: J3.23
IL07_00-J3A.SDRCC.GPIO15.D14_5: J3.25
IL12_00-07_01.DDRCC.S01C_5_N: 
IL12_00-07_01.DDRCC.S01C_5_P: 
IL12_00-07_01.DDRCC.S2_5: 
IL12_00-07_01.DDRCC.S3_5: 
IL12_00-07_01.DDRCC.S4_5: 
IL12_00-07_01.DDRCC.S5_5: 
IL12_00-07_01.DDRCC.S6_5: 
IL12_00-07_01.DDRCC.S7_5: 
IL12_00-07_01.DDRCC.S8_5: 
IL12_00-07_01.DDRCC.S9_5: 
IL12_00-07_01.DDRCC.S10_5: 
IL12_00-07_01.DDRCC.S11_5: 
IL12_00-07_01.DDRCC.S12_5: 
IL12_00-07_01.DDRCC.S13_5: 
IL12_00-07_01.DDRCC.S14_5: 
IL12_00-07_01.DDRCC.S15_5: 
IL12_00-07_01.DDRCC.S16_5: 
IL12_00-07_01.DDRCC.S17_5: 
IL12_00-07_01.DDRCC.S18_5: 
IL12_00-07_01.DDRCC.S19_5: 
IL12_00-07_01.DDRCC.S20_5: 
IL12_00-07_01.DDRCC.S21_5: 
IL12_00-07_01.DDRCC.S22_5: 
IL12_00-07_01.DDRCC.S23_5: 
IL12_00-07_01.DDRCC.S24_5: 
IL12_00-07_01.DDRCC.S25_5: 
IL12_00-07_01.DDRCC.S26_5: 
IL12_00-07_01.DDRCC.S27_5: 
IL12_00-07_01.DDRCC.S28_5: 
IL12_00-07_01.DDRCC.S29_5: 
IL12_00-07_01.DDRCC.S30_5: 
IL12_00-07_01.DDRCC.S31_5: 
IL12_00-07_01.DDRCC.S32_5: 
IL12_00-07_01.DDRCC.S33_5: 
IL12_00-07_01.DDRCC.S34_5: 
IL12_00-07_01.DDRCC.S35_5: 
IL12_00-07_01.DDRCC.S36_5: 
IL12_00-07_01.DDRCC.S37_5: 
IL12_00-07_01.DDRCC.S38_5: 
IL12_00-07_01.DDRCC.S39_5: 
IL12_00-07_01.DDRCC.S40_5: 
IL12_00-07_01.DDRCC.S41_5: 
IL12_00-07_01.DDRCC.S42_5: 
IL12_00-07_01.DDRCC.S43_5: 
IL12_00-07_01.DDRCC.S44_5: 
IL12_00-07_01.DDRCC.S45_5: 
IL12_00-07_01.DDRCC.S46_5: 
IL12_00-07_01.SDRCC.GPIO8.D0_5: 
IL12_00-07_01.SDRCC.GPIO8.D1_5: 
IL12_00-07_01.SDRCC.GPIO8.D2_5: 
IL12_00-07_01.SDRCC.GPIO8.D3_5: 
IL12_00-07_01.SDRCC.GPIO8.D4_5: 
IL12_00-07_01.SDRCC.GPIO8.D5_5: 
IL12_00-07_01.SDRCC.GPIO8.D6_5: 
IL12_00-07_01.SDRCC.GPIO8.D7_5: 
IL12_00-07_01.SDRCC.GPIO15.D01C_5_N: 
IL12_00-07_01.SDRCC.GPIO15.D01C_5_P: 
IL12_00-07_01.SDRCC.GPIO15.D2_5: 
IL12_00-07_01.SDRCC.GPIO15.D3_5: 
IL12_00-07_01.SDRCC.GPIO15.D4_5: 
IL12_00-07_01.SDRCC.GPIO15.D5_5: 
IL12_00-07_01.SDRCC.GPIO15.D6_5: 
IL12_00-07_01.SDRCC.GPIO15.D7_5: 
IL12_00-07_01.SDRCC.GPIO15.D8_5: 
IL12_00-07_01.SDRCC.GPIO15.D9_5: 
IL12_00-07_01.SDRCC.GPIO15.D10_5: 
IL12_00-07_01.SDRCC.GPIO15.D11_5: 
IL12_00-07_01.SDRCC.GPIO15.D12_5: 
IL12_00-07_01.SDRCC.GPIO15.D13_5: 
IL12_00-07_01.SDRCC.GPIO15.D14_5: 
IL12_01-07_02.DDRCC.S01C_5_N: 
IL12_01-07_02.DDRCC.S01C_5_P: 
IL12_01-07_02.DDRCC.S2_5: 
IL12_01-07_02.DDRCC.S3_5: 
IL12_01-07_02.DDRCC.S4_5: 
IL12_01-07_02.DDRCC.S5_5: 
IL12_01-07_02.DDRCC.S6_5: 
IL12_01-07_02.DDRCC.S7_5: 
IL12_01-07_02.DDRCC.S8_5: 
IL12_01-07_02.DDRCC.S9_5: 
IL12_01-07_02.DDRCC.S10_5: 
IL12_01-07_02.DDRCC.S11_5: 
IL12_01-07_02.DDRCC.S12_5: 
IL12_01-07_02.DDRCC.S13_5: 
IL12_01-07_02.DDRCC.S14_5: 
IL12_01-07_02.DDRCC.S15_5: 
IL12_01-07_02.DDRCC.S16_5: 
IL12_01-07_02.DDRCC.S17_5: 
IL12_01-07_02.DDRCC.S18_5: 
IL12_01-07_02.DDRCC.S19_5: 
IL12_01-07_02.DDRCC.S20_5: 
IL12_01-07_02.DDRCC.S21_5: 
IL12_01-07_02.DDRCC.S22_5: 
IL12_01-07_02.DDRCC.S23_5: 
IL12_01-07_02.DDRCC.S24_5: 
IL12_01-07_02.DDRCC.S25_5: 
IL12_01-07_02.DDRCC.S26_5: 
IL12_01-07_02.DDRCC.S27_5: 
IL12_01-07_02.DDRCC.S28_5: 
IL12_01-07_02.DDRCC.S29_5: 
IL12_01-07_02.DDRCC.S30_5: 
IL12_01-07_02.DDRCC.S31_5: 
IL12_01-07_02.DDRCC.S32_5: 
IL12_01-07_02.DDRCC.S33_5: 
IL12_01-07_02.DDRCC.S34_5: 
IL12_01-07_02.DDRCC.S35_5: 
IL12_01-07_02.DDRCC.S36_5: 
IL12_01-07_02.DDRCC.S37_5: 
IL12_01-07_02.DDRCC.S38_5: 
IL12_01-07_02.DDRCC.S39_5: 
IL12_01-07_02.DDRCC.S40_5: 
IL12_01-07_02.DDRCC.S41_5: 
IL12_01-07_02.DDRCC.S42_5: 
IL12_01-07_02.DDRCC.S43_5: 
IL12_01-07_02.DDRCC.S44_5: 
IL12_01-07_02.DDRCC.S45_5: 
IL12_01-07_02.DDRCC.S46_5: 
IL12_01-07_02.SDRCC.GPIO8.D0_5: 
IL12_01-07_02.SDRCC.GPIO8.D1_5: 
IL12_01-07_02.SDRCC.GPIO8.D2_5: 
IL12_01-07_02.SDRCC.GPIO8.D3_5: 
IL12_01-07_02.SDRCC.GPIO8.D4_5: 
IL12_01-07_02.SDRCC.GPIO8.D5_5: 
IL12_01-07_02.SDRCC.GPIO8.D6_5: 
IL12_01-07_02.SDRCC.GPIO8.D7_5: 
IL12_01-07_02.SDRCC.GPIO15.D01C_5_N: 
IL12_01-07_02.SDRCC.GPIO15.D01C_5_P: 
IL12_01-07_02.SDRCC.GPIO15.D2_5: 
IL12_01-07_02.SDRCC.GPIO15.D3_5: 
IL12_01-07_02.SDRCC.GPIO15.D4_5: 
IL12_01-07_02.SDRCC.GPIO15.D5_5: 
IL12_01-07_02.SDRCC.GPIO15.D6_5: 
IL12_01-07_02.SDRCC.GPIO15.D7_5: 
IL12_01-07_02.SDRCC.GPIO15.D8_5: 
IL12_01-07_02.SDRCC.GPIO15.D9_5: 
IL12_01-07_02.SDRCC.GPIO15.D10_5: 
IL12_01-07_02.SDRCC.GPIO15.D11_5: 
IL12_01-07_02.SDRCC.GPIO15.D12_5: 
IL12_01-07_02.SDRCC.GPIO15.D13_5: 
IL12_01-07_02.SDRCC.GPIO15.D14_5: 
IL12_02-07_03.DDRCC.S01C_5_N: 
IL12_02-07_03.DDRCC.S01C_5_P: 
IL12_02-07_03.DDRCC.S2_5: 
IL12_02-07_03.DDRCC.S3_5: 
IL12_02-07_03.DDRCC.S4_5: 
IL12_02-07_03.DDRCC.S5_5: 
IL12_02-07_03.DDRCC.S6_5: 
IL12_02-07_03.DDRCC.S7_5: 
IL12_02-07_03.DDRCC.S8_5: 
IL12_02-07_03.DDRCC.S9_5: 
IL12_02-07_03.DDRCC.S10_5: 
IL12_02-07_03.DDRCC.S11_5: 
IL12_02-07_03.DDRCC.S12_5: 
IL12_02-07_03.DDRCC.S13_5: 
IL12_02-07_03.DDRCC.S14_5: 
IL12_02-07_03.DDRCC.S15_5: 
IL12_02-07_03.DDRCC.S16_5: 
IL12_02-07_03.DDRCC.S17_5: 
IL12_02-07_03.DDRCC.S18_5: 
IL12_02-07_03.DDRCC.S19_5: 
IL12_02-07_03.DDRCC.S20_5: 
IL12_02-07_03.DDRCC.S21_5: 
IL12_02-07_03.DDRCC.S22_5: 
IL12_02-07_03.DDRCC.S23_5: 
IL12_02-07_03.DDRCC.S24_5: 
IL12_02-07_03.DDRCC.S25_5: 
IL12_02-07_03.DDRCC.S26_5: 
IL12_02-07_03.DDRCC.S27_5: 
IL12_02-07_03.DDRCC.S28_5: 
IL12_02-07_03.DDRCC.S29_5: 
IL12_02-07_03.DDRCC.S30_5: 
IL12_02-07_03.DDRCC.S31_5: 
IL12_02-07_03.DDRCC.S32_5: 
IL12_02-07_03.DDRCC.S33_5: 
IL12_02-07_03.DDRCC.S34_5: 
IL12_02-07_03.DDRCC.S35_5: 
IL12_02-07_03.DDRCC.S36_5: 
IL12_02-07_03.DDRCC.S37_5: 
IL12_02-07_03.DDRCC.S38_5: 
IL12_02-07_03.DDRCC.S39_5: 
IL12_02-07_03.DDRCC.S40_5: 
IL12_02-07_03.DDRCC.S41_5: 
IL12_02-07_03.DDRCC.S42_5: 
IL12_02-07_03.DDRCC.S43_5: 
IL12_02-07_03.DDRCC.S44_5: 
IL12_02-07_03.DDRCC.S45_5: 
IL12_02-07_03.DDRCC.S46_5: 
IL12_02-07_03.SDRCC.GPIO8.D0_5: 
IL12_02-07_03.SDRCC.GPIO8.D1_5: 
IL12_02-07_03.SDRCC.GPIO8.D2_5: 
IL12_02-07_03.SDRCC.GPIO8.D3_5: 
IL12_02-07_03.SDRCC.GPIO8.D4_5: 
IL12_02-07_03.SDRCC.GPIO8.D5_5: 
IL12_02-07_03.SDRCC.GPIO8.D6_5: 
IL12_02-07_03.SDRCC.GPIO8.D7_5: 
IL12_02-07_03.SDRCC.GPIO15.D01C_5_N: 
IL12_02-07_03.SDRCC.GPIO15.D01C_5_P: 
IL12_02-07_03.SDRCC.GPIO15.D2_5: 
IL12_02-07_03.SDRCC.GPIO15.D3_5: 
IL12_02-07_03.SDRCC.GPIO15.D4_5: 
IL12_02-07_03.SDRCC.GPIO15.D5_5: 
IL12_02-07_03.SDRCC.GPIO15.D6_5: 
IL12_02-07_03.SDRCC.GPIO15.D7_5: 
IL12_02-07_03.SDRCC.GPIO15.D8_5: 
IL12_02-07_03.SDRCC.GPIO15.D9_5: 
IL12_02-07_03.SDRCC.GPIO15.D10_5: 
IL12_02-07_03.SDRCC.GPIO15.D11_5: 
IL12_02-07_03.SDRCC.GPIO15.D12_5: 
IL12_02-07_03.SDRCC.GPIO15.D13_5: 
IL12_02-07_03.SDRCC.GPIO15.D14_5: 
IL12_03-J2B.DDRCC.S01C_5_N: 
IL12_03-J2B.DDRCC.S01C_5_P: J2.202
IL12_03-J2B.DDRCC.S2_5: J2.205
IL12_03-J2B.DDRCC.S3_5: J2.206
IL12_03-J2B.DDRCC.S4_5: J2.208
IL12_03-J2B.DDRCC.S5_5: J2.209
IL12_03-J2B.DDRCC.S6_5: J2.212
IL12_03-J2B.DDRCC.S7_5: J2.213
IL12_03-J2B.DDRCC.S8_5: J2.215
IL12_03-J2B.DDRCC.S9_5: J2.216
IL12_03-J2B.DDRCC.S10_5: J2.218
IL12_03-J2B.DDRCC.S11_5: J2.219
IL12_03-J2B.DDRCC.S12_5: J2.222
IL12_03-J2B.DDRCC.S13_5: J2.223
IL12_03-J2B.DDRCC.S14_5: J2.225
IL12_03-J2B.DDRCC.S15_5: J2.226
IL12_03-J2B.DDRCC.S16_5: J2.228
IL12_03-J2B.DDRCC.S17_5: J2.229
IL12_03-J2B.DDRCC.S18_5: J2.232
IL12_03-J2B.DDRCC.S19_5: J2.233
IL12_03-J2B.DDRCC.S20_5: J2.235
IL12_03-J2B.DDRCC.S21_5: J2.236
IL12_03-J2B.DDRCC.S22_5: J2.238
IL12_03-J2B.DDRCC.S23_5: J2.239
IL12_03-J2B.DDRCC.S24_5: J2.242
IL12_03-J2B.DDRCC.S25_5: J2.243
IL12_03-J2B.DDRCC.S26_5: J2.245
IL12_03-J2B.DDRCC.S27_5: J2.246
IL12_03-J2B.DDRCC.S28_5: J2.248
IL12_03-J2B.DDRCC.S29_5: J2.249
IL12_03-J2B.DDRCC.S30_5: J2.252
IL12_03-J2B.DDRCC.S31_5: J2.253
IL12_03-J2B.DDRCC.S32_5: J2.255
IL12_03-J2B.DDRCC.S33_5: J2.256
IL12_03-J2B.DDRCC.S34_5: J2.258
IL12_03-J2B.DDRCC.S35_5: J2.259
IL12_03-J2B.DDRCC.S36_5: J2.262
IL12_03-J2B.DDRCC.S37_5: J2.263
IL12_03-J2B.DDRCC.S38_5: J2.265
IL12_03-J2B.DDRCC.S39_5: J2.266
IL12_03-J2B.DDRCC.S40_5: J2.268
IL12_03-J2B.DDRCC.S41_5: J2.269
IL12_03-J2B.DDRCC.S42_5: J2.272
IL12_03-J2B.DDRCC.S43_5: J2.273
IL12_03-J2B.DDRCC.S44_5: J2.275
IL12_03-J2B.DDRCC.S45_5: J2.276
IL12_03-J2B.DDRCC.S46_5: J2.278
IL12_03-J2B.SDRCC.GPIO8.D0_5: J2.306
IL12_03-J2B.SDRCC.GPIO8.D1_5: J2.308
IL12_03-J2B.SDRCC.GPIO8.D2_5: J2.309
IL12_03-J2B.SDRCC.GPIO8.D3_5: J2.312
IL12_03-J2B.SDRCC.GPIO8.D4_5: J2.313
IL12_03-J2B.SDRCC.GPIO8.D5_5: J2.315
IL12_03-J2B.SDRCC.GPIO8.D6_5: J2.316
IL12_03-J2B.SDRCC.GPIO8.D7_5: J2.318
IL12_03-J2B.SDRCC.GPIO15.D01C_5_N: J2.283
IL12_03-J2B.SDRCC.GPIO15.D01C_5_P: J2.282
IL12_03-J2B.SDRCC.GPIO15.D2_5: J2.285
IL12_03-J2B.SDRCC.GPIO15.D3_5: J2.286
IL12_03-J2B.SDRCC.GPIO15.D4_5: J2.288
IL12_03-J2B.SDRCC.GPIO15.D5_5: J2.289
IL12_03-J2B.SDRCC.GPIO15.D6_5: J2.292
IL12_03-J2B.SDRCC.GPIO15.D7_5: J2.293
IL12_03-J2B.SDRCC.GPIO15.D8_5: J2.295
IL12_03-J2B.SDRCC.GPIO15.D9_5: J2.296
IL12_03-J2B.SDRCC.GPIO15.D10_5: J2.298
IL12_03-J2B.SDRCC.GPIO15.D11_5: J2.299
IL12_03-J2B.SDRCC.GPIO15.D12_5: J2.302
IL12_03-J2B.SDRCC.GPIO15.D13_5: J2.303
IL12_03-J2B.SDRCC.GPIO15.D14_5: J2.305
IL12_10-68_11.DDRCC.S01C_5_N: 
IL12_10-68_11.DDRCC.S01C_5_P: 
IL12_10-68_11.DDRCC.S2_5: 
IL12_10-68_11.DDRCC.S3_5: 
IL12_10-68_11.DDRCC.S4_5: 
IL12_10-68_11.DDRCC.S5_5: 
IL12_10-68_11.DDRCC.S6_5: 
IL12_10-68_11.DDRCC.S7_5: 
IL12_10-68_11.DDRCC.S8_5: 
IL12_10-68_11.DDRCC.S9_5: 
IL12_10-68_11.DDRCC.S10_5: 
IL12_10-68_11.DDRCC.S11_5: 
IL12_10-68_11.DDRCC.S12_5: 
IL12_10-68_11.DDRCC.S13_5: 
IL12_10-68_11.DDRCC.S14_5: 
IL12_10-68_11.DDRCC.S15_5: 
IL12_10-68_11.DDRCC.S16_5: 
IL12_10-68_11.DDRCC.S17_5: 
IL12_10-68_11.DDRCC.S18_5: 
IL12_10-68_11.DDRCC.S19_5: 
IL12_10-68_11.DDRCC.S20_5: 
IL12_10-68_11.DDRCC.S21_5: 
IL12_10-68_11.DDRCC.S22_5: 
IL12_10-68_11.DDRCC.S23_5: 
IL12_10-68_11.DDRCC.S24_5: 
IL12_10-68_11.DDRCC.S25_5: 
IL12_10-68_11.DDRCC.S26_5: 
IL12_10-68_11.DDRCC.S27_5: 
IL12_10-68_11.DDRCC.S28_5: 
IL12_10-68_11.DDRCC.S29_5: 
IL12_10-68_11.DDRCC.S30_5: 
IL12_10-68_11.DDRCC.S31_5: 
IL12_10-68_11.DDRCC.S32_5: 
IL12_10-68_11.DDRCC.S33_5: 
IL12_10-68_11.DDRCC.S34_5: 
IL12_10-68_11.DDRCC.S35_5: 
IL12_10-68_11.DDRCC.S36_5: 
IL12_10-68_11.DDRCC.S37_5: 
IL12_10-68_11.DDRCC.S38_5: 
IL12_10-68_11.DDRCC.S39_5: 
IL12_10-68_11.DDRCC.S40_5: 
IL12_10-68_11.DDRCC.S41_5: 
IL12_10-68_11.DDRCC.S42_5: 
IL12_10-68_11.DDRCC.S43_5: 
IL12_10-68_11.DDRCC.S44_5: 
IL12_10-68_11.DDRCC.S45_5: 
IL12_10-68_11.DDRCC.S46_5: 
IL12_10-68_11.SDRCC.GPIO8.D0_5: 
IL12_10-68_11.SDRCC.GPIO8.D1_5: 
IL12_10-68_11.SDRCC.GPIO8.D2_5: 
IL12_10-68_11.SDRCC.GPIO8.D3_5: 
IL12_10-68_11.SDRCC.GPIO8.D4_5: 
IL12_10-68_11.SDRCC.GPIO8.D5_5: 
IL12_10-68_11.SDRCC.GPIO8.D6_5: 
IL12_10-68_11.SDRCC.GPIO8.D7_5: 
IL12_10-68_11.SDRCC.GPIO15.D01C_5_N: 
IL12_10-68_11.SDRCC.GPIO15.D01C_5_P: 
IL12_10-68_11.SDRCC.GPIO15.D2_5: 
IL12_10-68_11.SDRCC.GPIO15.D3_5: 
IL12_10-68_11.SDRCC.GPIO15.D4_5: 
IL12_10-68_11.SDRCC.GPIO15.D5_5: 
IL12_10-68_11.SDRCC.GPIO15.D6_5: 
IL12_10-68_11.SDRCC.GPIO15.D7_5: 
IL12_10-68_11.SDRCC.GPIO15.D8_5: 
IL12_10-68_11.SDRCC.GPIO15.D9_5: 
IL12_10-68_11.SDRCC.GPIO15.D10_5: 
IL12_10-68_11.SDRCC.GPIO15.D11_5: 
IL12_10-68_11.SDRCC.GPIO15.D12_5: 
IL12_10-68_11.SDRCC.GPIO15.D13_5: 
IL12_10-68_11.SDRCC.GPIO15.D14_5: 
IL12_11-68_12.DDRCC.S01C_5_N: 
IL12_11-68_12.DDRCC.S01C_5_P: 
IL12_11-68_12.DDRCC.S2_5: 
IL12_11-68_12.DDRCC.S3_5: 
IL12_11-68_12.DDRCC.S4_5: 
IL12_11-68_12.DDRCC.S5_5: 
IL12_11-68_12.DDRCC.S6_5: 
IL12_11-68_12.DDRCC.S7_5: 
IL12_11-68_12.DDRCC.S8_5: 
IL12_11-68_12.DDRCC.S9_5: 
IL12_11-68_12.DDRCC.S10_5: 
IL12_11-68_12.DDRCC.S11_5: 
IL12_11-68_12.DDRCC.S12_5: 
IL12_11-68_12.DDRCC.S13_5: 
IL12_11-68_12.DDRCC.S14_5: 
IL12_11-68_12.DDRCC.S15_5: 
IL12_11-68_12.DDRCC.S16_5: 
IL12_11-68_12.DDRCC.S17_5: 
IL12_11-68_12.DDRCC.S18_5: 
IL12_11-68_12.DDRCC.S19_5: 
IL12_11-68_12.DDRCC.S20_5: 
IL12_11-68_12.DDRCC.S21_5: 
IL12_11-68_12.DDRCC.S22_5: 
IL12_11-68_12.DDRCC.S23_5: 
IL12_11-68_12.DDRCC.S24_5: 
IL12_11-68_12.DDRCC.S25_5: 
IL12_11-68_12.DDRCC.S26_5: 
IL12_11-68_12.DDRCC.S27_5: 
IL12_11-68_12.DDRCC.S28_5: 
IL12_11-68_12.DDRCC.S29_5: 
IL12_11-68_12.DDRCC.S30_5: 
IL12_11-68_12.DDRCC.S31_5: 
IL12_11-68_12.DDRCC.S32_5: 
IL12_11-68_12.DDRCC.S33_5: 
IL12_11-68_12.DDRCC.S34_5: 
IL12_11-68_12.DDRCC.S35_5: 
IL12_11-68_12.DDRCC.S36_5: 
IL12_11-68_12.DDRCC.S37_5: 
IL12_11-68_12.DDRCC.S38_5: 
IL12_11-68_12.DDRCC.S39_5: 
IL12_11-68_12.DDRCC.S40_5: 
IL12_11-68_12.DDRCC.S41_5: 
IL12_11-68_12.DDRCC.S42_5: 
IL12_11-68_12.DDRCC.S43_5: 
IL12_11-68_12.DDRCC.S44_5: 
IL12_11-68_12.DDRCC.S45_5: 
IL12_11-68_12.DDRCC.S46_5: 
IL12_11-68_12.SDRCC.GPIO8.D0_5: 
IL12_11-68_12.SDRCC.GPIO8.D1_5: 
IL12_11-68_12.SDRCC.GPIO8.D2_5: 
IL12_11-68_12.SDRCC.GPIO8.D3_5: 
IL12_11-68_12.SDRCC.GPIO8.D4_5: 
IL12_11-68_12.SDRCC.GPIO8.D5_5: 
IL12_11-68_12.SDRCC.GPIO8.D6_5: 
IL12_11-68_12.SDRCC.GPIO8.D7_5: 
IL12_11-68_12.SDRCC.GPIO15.D01C_5_N: 
IL12_11-68_12.SDRCC.GPIO15.D01C_5_P: 
IL12_11-68_12.SDRCC.GPIO15.D2_5: 
IL12_11-68_12.SDRCC.GPIO15.D3_5: 
IL12_11-68_12.SDRCC.GPIO15.D4_5: 
IL12_11-68_12.SDRCC.GPIO15.D5_5: 
IL12_11-68_12.SDRCC.GPIO15.D6_5: 
IL12_11-68_12.SDRCC.GPIO15.D7_5: 
IL12_11-68_12.SDRCC.GPIO15.D8_5: 
IL12_11-68_12.SDRCC.GPIO15.D9_5: 
IL12_11-68_12.SDRCC.GPIO15.D10_5: 
IL12_11-68_12.SDRCC.GPIO15.D11_5: 
IL12_11-68_12.SDRCC.GPIO15.D12_5: 
IL12_11-68_12.SDRCC.GPIO15.D13_5: 
IL12_11-68_12.SDRCC.GPIO15.D14_5: 
IL12_12-68_13.DDRCC.S01C_5_N: 
IL12_12-68_13.DDRCC.S01C_5_P: 
IL12_12-68_13.DDRCC.S2_5: 
IL12_12-68_13.DDRCC.S3_5: 
IL12_12-68_13.DDRCC.S4_5: 
IL12_12-68_13.DDRCC.S5_5: 
IL12_12-68_13.DDRCC.S6_5: 
IL12_12-68_13.DDRCC.S7_5: 
IL12_12-68_13.DDRCC.S8_5: 
IL12_12-68_13.DDRCC.S9_5: 
IL12_12-68_13.DDRCC.S10_5: 
IL12_12-68_13.DDRCC.S11_5: 
IL12_12-68_13.DDRCC.S12_5: 
IL12_12-68_13.DDRCC.S13_5: 
IL12_12-68_13.DDRCC.S14_5: 
IL12_12-68_13.DDRCC.S15_5: 
IL12_12-68_13.DDRCC.S16_5: 
IL12_12-68_13.DDRCC.S17_5: 
IL12_12-68_13.DDRCC.S18_5: 
IL12_12-68_13.DDRCC.S19_5: 
IL12_12-68_13.DDRCC.S20_5: 
IL12_12-68_13.DDRCC.S21_5: 
IL12_12-68_13.DDRCC.S22_5: 
IL12_12-68_13.DDRCC.S23_5: 
IL12_12-68_13.DDRCC.S24_5: 
IL12_12-68_13.DDRCC.S25_5: 
IL12_12-68_13.DDRCC.S26_5: 
IL12_12-68_13.DDRCC.S27_5: 
IL12_12-68_13.DDRCC.S28_5: 
IL12_12-68_13.DDRCC.S29_5: 
IL12_12-68_13.DDRCC.S30_5: 
IL12_12-68_13.DDRCC.S31_5: 
IL12_12-68_13.DDRCC.S32_5: 
IL12_12-68_13.DDRCC.S33_5: 
IL12_12-68_13.DDRCC.S34_5: 
IL12_12-68_13.DDRCC.S35_5: 
IL12_12-68_13.DDRCC.S36_5: 
IL12_12-68_13.DDRCC.S37_5: 
IL12_12-68_13.DDRCC.S38_5: 
IL12_12-68_13.DDRCC.S39_5: 
IL12_12-68_13.DDRCC.S40_5: 
IL12_12-68_13.DDRCC.S41_5: 
IL12_12-68_13.DDRCC.S42_5: 
IL12_12-68_13.DDRCC.S43_5: 
IL12_12-68_13.DDRCC.S44_5: 
IL12_12-68_13.DDRCC.S45_5: 
IL12_12-68_13.DDRCC.S46_5: 
IL12_12-68_13.SDRCC.GPIO8.D0_5: 
IL12_12-68_13.SDRCC.GPIO8.D1_5: 
IL12_12-68_13.SDRCC.GPIO8.D2_5: 
IL12_12-68_13.SDRCC.GPIO8.D3_5: 
IL12_12-68_13.SDRCC.GPIO8.D4_5: 
IL12_12-68_13.SDRCC.GPIO8.D5_5: 
IL12_12-68_13.SDRCC.GPIO8.D6_5: 
IL12_12-68_13.SDRCC.GPIO8.D7_5: 
IL12_12-68_13.SDRCC.GPIO15.D01C_5_N: 
IL12_12-68_13.SDRCC.GPIO15.D01C_5_P: 
IL12_12-68_13.SDRCC.GPIO15.D2_5: 
IL12_12-68_13.SDRCC.GPIO15.D3_5: 
IL12_12-68_13.SDRCC.GPIO15.D4_5: 
IL12_12-68_13.SDRCC.GPIO15.D5_5: 
IL12_12-68_13.SDRCC.GPIO15.D6_5: 
IL12_12-68_13.SDRCC.GPIO15.D7_5: 
IL12_12-68_13.SDRCC.GPIO15.D8_5: 
IL12_12-68_13.SDRCC.GPIO15.D9_5: 
IL12_12-68_13.SDRCC.GPIO15.D10_5: 
IL12_12-68_13.SDRCC.GPIO15.D11_5: 
IL12_12-68_13.SDRCC.GPIO15.D12_5: 
IL12_12-68_13.SDRCC.GPIO15.D13_5: 
IL12_12-68_13.SDRCC.GPIO15.D14_5: 
IL12_13-J2A.DDRCC.S01C_5_N: 
IL12_13-J2A.DDRCC.S01C_5_P: J2.2
IL12_13-J2A.DDRCC.S2_5: J2.5
IL12_13-J2A.DDRCC.S3_5: J2.6
IL12_13-J2A.DDRCC.S4_5: J2.8
IL12_13-J2A.DDRCC.S5_5: J2.9
IL12_13-J2A.DDRCC.S6_5: J2.12
IL12_13-J2A.DDRCC.S7_5: J2.13
IL12_13-J2A.DDRCC.S8_5: J2.15
IL12_13-J2A.DDRCC.S9_5: J2.16
IL12_13-J2A.DDRCC.S10_5: J2.18
IL12_13-J2A.DDRCC.S11_5: J2.19
IL12_13-J2A.DDRCC.S12_5: J2.22
IL12_13-J2A.DDRCC.S13_5: J2.23
IL12_13-J2A.DDRCC.S14_5: J2.25
IL12_13-J2A.DDRCC.S15_5: J2.26
IL12_13-J2A.DDRCC.S16_5: J2.28
IL12_13-J2A.DDRCC.S17_5: J2.29
IL12_13-J2A.DDRCC.S18_5: J2.32
IL12_13-J2A.DDRCC.S19_5: J2.33
IL12_13-J2A.DDRCC.S20_5: J2.35
IL12_13-J2A.DDRCC.S21_5: J2.36
IL12_13-J2A.DDRCC.S22_5: J2.38
IL12_13-J2A.DDRCC.S23_5: J2.39
IL12_13-J2A.DDRCC.S24_5: J2.42
IL12_13-J2A.DDRCC.S25_5: J2.43
IL12_13-J2A.DDRCC.S26_5: J2.45
IL12_13-J2A.DDRCC.S27_5: J2.46
IL12_13-J2A.DDRCC.S28_5: J2.48
IL12_13-J2A.DDRCC.S29_5: J2.49
IL12_13-J2A.DDRCC.S30_5: J2.59
IL12_13-J2A.DDRCC.S31_5: J2.58
IL12_13-J2A.DDRCC.S32_5: J2.56
IL12_13-J2A.DDRCC.S33_5: J2.55
IL12_13-J2A.DDRCC.S34_5: J2.53
IL12_13-J2A.DDRCC.S35_5: J2.52
IL12_13-J2A.DDRCC.S36_5: J2.62
IL12_13-J2A.DDRCC.S37_5: J2.63
IL12_13-J2A.DDRCC.S38_5: J2.65
IL12_13-J2A.DDRCC.S39_5: J2.66
IL12_13-J2A.DDRCC.S40_5: J2.68
IL12_13-J2A.DDRCC.S41_5: J2.69
IL12_13-J2A.DDRCC.S42_5: J2.72
IL12_13-J2A.DDRCC.S43_5: J2.73
IL12_13-J2A.DDRCC.S44_5: J2.75
IL12_13-J2A.DDRCC.S45_5: J2.76
IL12_13-J2A.DDRCC.S46_5: J2.78
IL12_13-J2A.SDRCC.GPIO8.D0_5: J2.106
IL12_13-J2A.SDRCC.GPIO8.D1_5: J2.108
IL12_13-J2A.SDRCC.GPIO8.D2_5: J2.109
IL12_13-J2A.SDRCC.GPIO8.D3_5: J2.112
IL12_13-J2A.SDRCC.GPIO8.D4_5: J2.113
IL12_13-J2A.SDRCC.GPIO8.D5_5: J2.115
IL12_13-J2A.SDRCC.GPIO8.D6_5: J2.116
IL12_13-J2A.SDRCC.GPIO8.D7_5: J2.118
IL12_13-J2A.SDRCC.GPIO15.D01C_5_N: J2.83
IL12_13-J2A.SDRCC.GPIO15.D01C_5_P: J2.82
IL12_13-J2A.SDRCC.GPIO15.D2_5: J2.85
IL12_13-J2A.SDRCC.GPIO15.D3_5: J2.86
IL12_13-J2A.SDRCC.GPIO15.D4_5: J2.88
IL12_13-J2A.SDRCC.GPIO15.D5_5: J2.89
IL12_13-J2A.SDRCC.GPIO15.D6_5: J2.92
IL12_13-J2A.SDRCC.GPIO15.D7_5: J2.93
IL12_13-J2A.SDRCC.GPIO15.D8_5: J2.95
IL12_13-J2A.SDRCC.GPIO15.D9_5: J2.96
IL12_13-J2A.SDRCC.GPIO15.D10_5: J2.98
IL12_13-J2A.SDRCC.GPIO15.D11_5: J2.99
IL12_13-J2A.SDRCC.GPIO15.D12_5: J2.102
IL12_13-J2A.SDRCC.GPIO15.D13_5: J2.103
IL12_13-J2A.SDRCC.GPIO15.D14_5: J2.105
IL12_20-68_21.DDRCC.S01C_5_N: 
IL12_20-68_21.DDRCC.S01C_5_P: 
IL12_20-68_21.DDRCC.S2_5: 
IL12_20-68_21.DDRCC.S3_5: 
IL12_20-68_21.DDRCC.S4_5: 
IL12_20-68_21.DDRCC.S5_5: 
IL12_20-68_21.DDRCC.S6_5: 
IL12_20-68_21.DDRCC.S7_5: 
IL12_20-68_21.DDRCC.S8_5: 
IL12_20-68_21.DDRCC.S9_5: 
IL12_20-68_21.DDRCC.S10_5: 
IL12_20-68_21.DDRCC.S11_5: 
IL12_20-68_21.DDRCC.S12_5: 
IL12_20-68_21.DDRCC.S13_5: 
IL12_20-68_21.DDRCC.S14_5: 
IL12_20-68_21.DDRCC.S15_5: 
IL12_20-68_21.DDRCC.S16_5: 
IL12_20-68_21.DDRCC.S17_5: 
IL12_20-68_21.DDRCC.S18_5: 
IL12_20-68_21.DDRCC.S19_5: 
IL12_20-68_21.DDRCC.S20_5: 
IL12_20-68_21.DDRCC.S21_5: 
IL12_20-68_21.DDRCC.S22_5: 
IL12_20-68_21.DDRCC.S23_5: 
IL12_20-68_21.DDRCC.S24_5: 
IL12_20-68_21.DDRCC.S25_5: 
IL12_20-68_21.DDRCC.S26_5: 
IL12_20-68_21.DDRCC.S27_5: 
IL12_20-68_21.DDRCC.S28_5: 
IL12_20-68_21.DDRCC.S29_5: 
IL12_20-68_21.DDRCC.S30_5: 
IL12_20-68_21.DDRCC.S31_5: 
IL12_20-68_21.DDRCC.S32_5: 
IL12_20-68_21.DDRCC.S33_5: 
IL12_20-68_21.DDRCC.S34_5: 
IL12_20-68_21.DDRCC.S35_5: 
IL12_20-68_21.DDRCC.S36_5: 
IL12_20-68_21.DDRCC.S37_5: 
IL12_20-68_21.DDRCC.S38_5: 
IL12_20-68_21.DDRCC.S39_5: 
IL12_20-68_21.DDRCC.S40_5: 
IL12_20-68_21.DDRCC.S41_5: 
IL12_20-68_21.DDRCC.S42_5: 
IL12_20-68_21.DDRCC.S43_5: 
IL12_20-68_21.DDRCC.S44_5: 
IL12_20-68_21.DDRCC.S45_5: 
IL12_20-68_21.DDRCC.S46_5: 
IL12_20-68_21.SDRCC.GPIO8.D0_5: 
IL12_20-68_21.SDRCC.GPIO8.D1_5: 
IL12_20-68_21.SDRCC.GPIO8.D2_5: 
IL12_20-68_21.SDRCC.GPIO8.D3_5: 
IL12_20-68_21.SDRCC.GPIO8.D4_5: 
IL12_20-68_21.SDRCC.GPIO8.D5_5: 
IL12_20-68_21.SDRCC.GPIO8.D6_5: 
IL12_20-68_21.SDRCC.GPIO8.D7_5: 
IL12_20-68_21.SDRCC.GPIO15.D01C_5_N: 
IL12_20-68_21.SDRCC.GPIO15.D01C_5_P: 
IL12_20-68_21.SDRCC.GPIO15.D2_5: 
IL12_20-68_21.SDRCC.GPIO15.D3_5: 
IL12_20-68_21.SDRCC.GPIO15.D4_5: 
IL12_20-68_21.SDRCC.GPIO15.D5_5: 
IL12_20-68_21.SDRCC.GPIO15.D6_5: 
IL12_20-68_21.SDRCC.GPIO15.D7_5: 
IL12_20-68_21.SDRCC.GPIO15.D8_5: 
IL12_20-68_21.SDRCC.GPIO15.D9_5: 
IL12_20-68_21.SDRCC.GPIO15.D10_5: 
IL12_20-68_21.SDRCC.GPIO15.D11_5: 
IL12_20-68_21.SDRCC.GPIO15.D12_5: 
IL12_20-68_21.SDRCC.GPIO15.D13_5: 
IL12_20-68_21.SDRCC.GPIO15.D14_5: 
IL12_21-68_22.DDRCC.S01C_5_N: 
IL12_21-68_22.DDRCC.S01C_5_P: 
IL12_21-68_22.DDRCC.S2_5: 
IL12_21-68_22.DDRCC.S3_5: 
IL12_21-68_22.DDRCC.S4_5: 
IL12_21-68_22.DDRCC.S5_5: 
IL12_21-68_22.DDRCC.S6_5: 
IL12_21-68_22.DDRCC.S7_5: 
IL12_21-68_22.DDRCC.S8_5: 
IL12_21-68_22.DDRCC.S9_5: 
IL12_21-68_22.DDRCC.S10_5: 
IL12_21-68_22.DDRCC.S11_5: 
IL12_21-68_22.DDRCC.S12_5: 
IL12_21-68_22.DDRCC.S13_5: 
IL12_21-68_22.DDRCC.S14_5: 
IL12_21-68_22.DDRCC.S15_5: 
IL12_21-68_22.DDRCC.S16_5: 
IL12_21-68_22.DDRCC.S17_5: 
IL12_21-68_22.DDRCC.S18_5: 
IL12_21-68_22.DDRCC.S19_5: 
IL12_21-68_22.DDRCC.S20_5: 
IL12_21-68_22.DDRCC.S21_5: 
IL12_21-68_22.DDRCC.S22_5: 
IL12_21-68_22.DDRCC.S23_5: 
IL12_21-68_22.DDRCC.S24_5: 